# Altium PCB encoder.PcbDoc
Units mm, origin at the board's own origin, x right, y up, seen from the top; angles counter-clockwise.
Board outline 38.38 x 19.8 mm, 2 copper layers (Top Layer, Bottom Layer); 2 components, 4 nets, 12 pads, 24 vias.
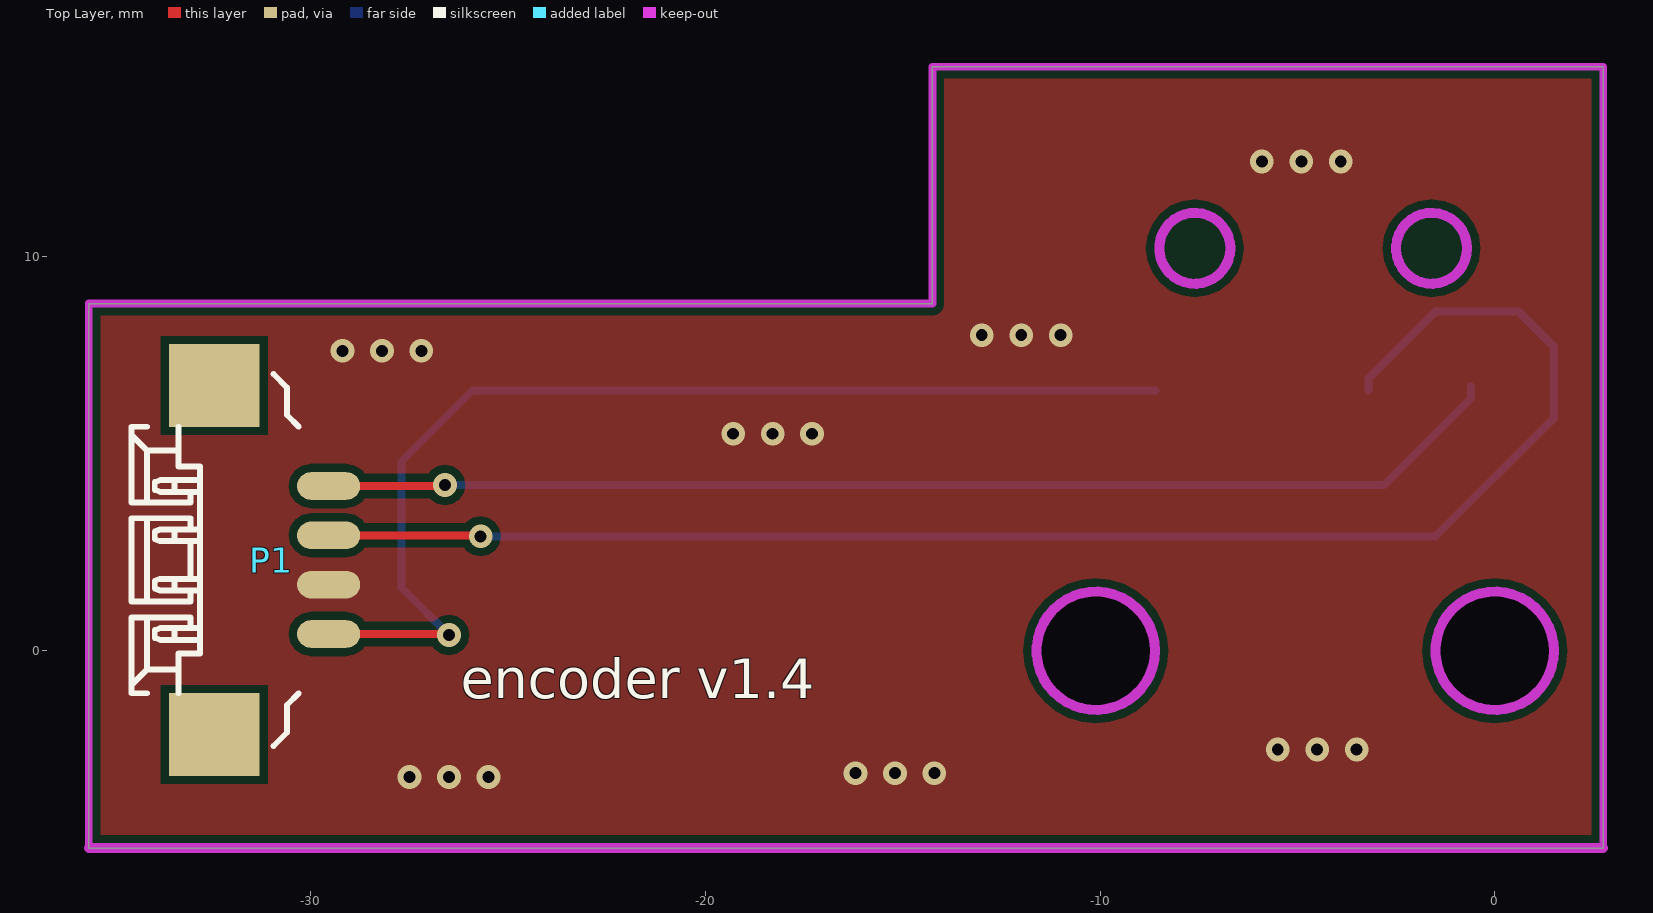
[diagram p0: Top Layer view]
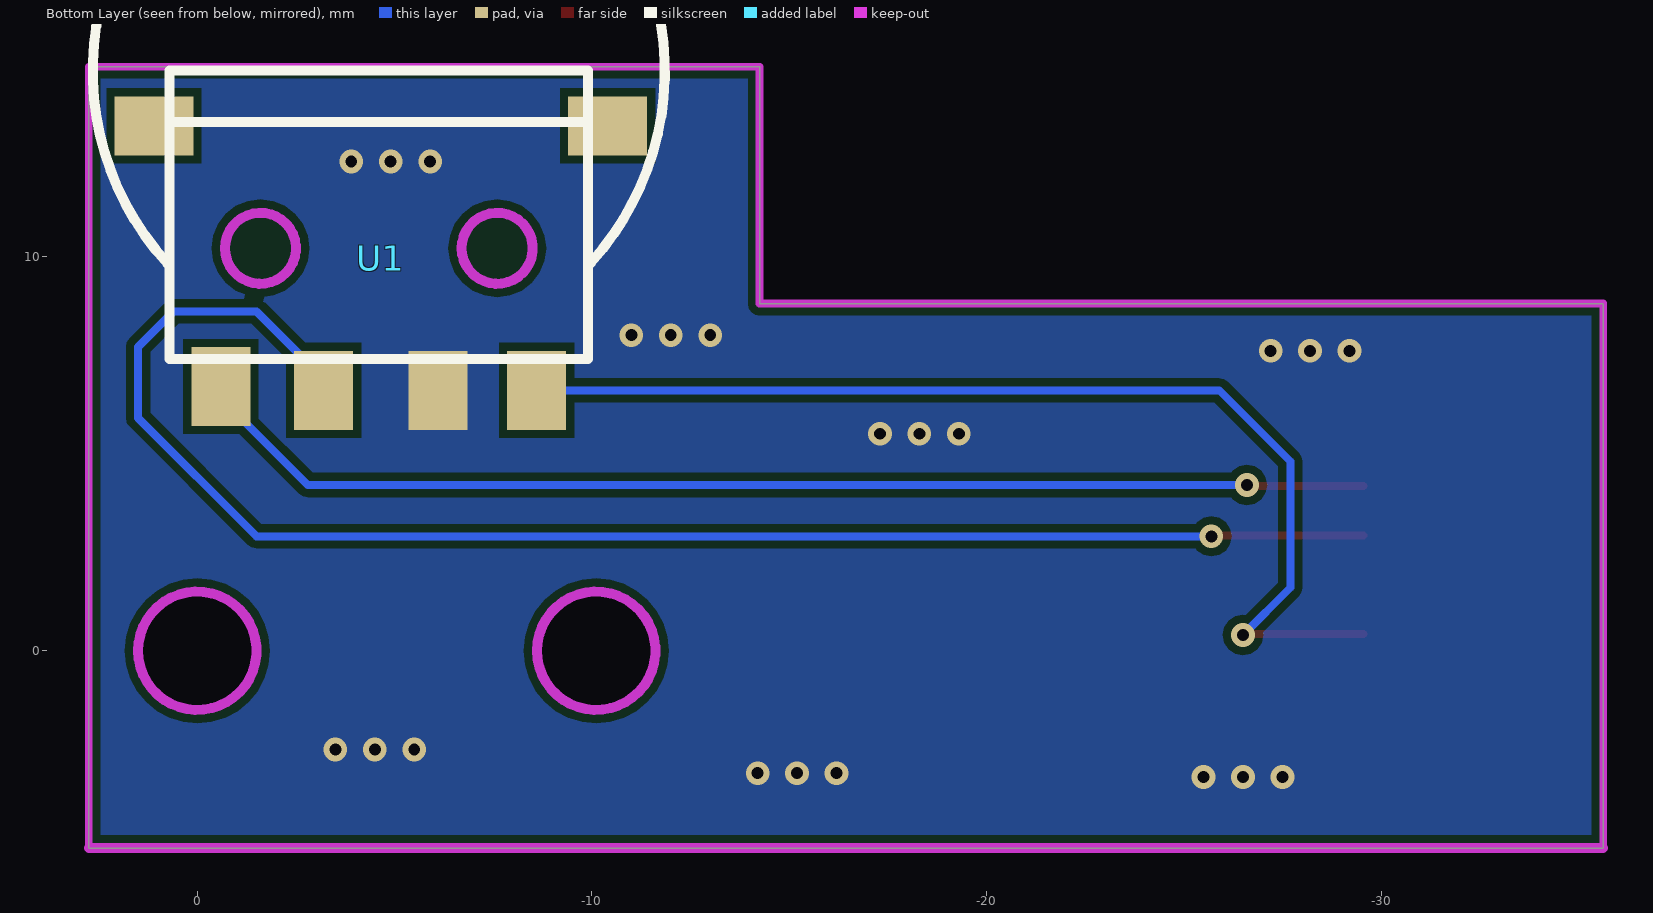
[diagram p1: Bottom Layer view, seen from below]

## Layer stack, top to bottom
Top Layer: signal copper 0.0356
Dielectric: dielectric 0.32, FR-4, Dk 4.8
Bottom Layer: signal copper 0.0356

## Board outline
-35.63,-5 2.75,-5 2.75,14.8 -14.25,14.8 -14.25,8.8 -35.63,8.8
cut-out: -1.507,0 -1.478,-0.294 -1.393,-0.577 -1.253,-0.837 -1.066,-1.066 -0.837,-1.253 -0.577,-1.393 -0.294,-1.478 0,-1.507 0.294,-1.478 0.577,-1.393 0.837,-1.253 1.066,-1.066 1.253,-0.837 1.393,-0.577 1.478,-0.294 1.507,0 1.478,0.294 1.393,0.577 1.253,0.837 1.066,1.066 0.837,1.253 0.577,1.393 0.294,1.478 0,1.507 -0.294,1.478 -0.577,1.393 -0.837,1.253 -1.066,1.066 -1.253,0.837 -1.393,0.577 -1.478,0.294
cut-out: -11.617,0 -11.588,-0.294 -11.503,-0.577 -11.363,-0.837 -11.176,-1.066 -10.947,-1.253 -10.687,-1.393 -10.404,-1.478 -10.11,-1.507 -9.816,-1.478 -9.533,-1.393 -9.273,-1.253 -9.044,-1.066 -8.857,-0.837 -8.717,-0.577 -8.632,-0.294 -8.603,0 -8.632,0.294 -8.717,0.577 -8.857,0.837 -9.044,1.066 -9.273,1.253 -9.533,1.393 -9.816,1.478 -10.11,1.507 -10.404,1.478 -10.687,1.393 -10.947,1.253 -11.176,1.066 -11.363,0.837 -11.503,0.577 -11.588,0.294

## Design rules (kind name [scope] priority, off if disabled: settings)
Clearance [All] p1: gap=0.2
ComponentClearance [All] p1 off: gap=0.254 collisioncheckmode=3 verticalgap=0.254 showdistances=FALSE
PolygonConnect [All] p1: connectstyle=Direct reliefconductorwidth=0.254 reliefentries=4 polygonreliefangle="90 Angle"
RoutingVias [All] p1: holewidth=0.3 width=0.6 viastyle="Through Hole" minholewidth=0.3 minwidth=0.6 maxholewidth=0.3 maxwidth=0.6
SilkscreenOverComponentPads [All] p1: minsilkscreentomaskgap=0.254
SolderMaskExpansion [All] p1: expansion=0.102
Width [All] p1: maxlimit=3 minlimit=0.2 preferedwidth=0.2
26 further rules are at their usual default settings.

## Components (designator, comment, footprint, x,y, rotation, side; value= is the part's Value field where it differs from the comment)
P1 "" "MX1.25-4P 卧" -31,2.3 r90 top
U1 "SIQ-02FVS3滚轮编码器" 美上美SIQ-02FVS3滚轮编码器 -4.6,14.7 r180 bottom

## Footprints (in the part's own frame and the unit in brackets; to place one, negate y for a bottom-side part, rotate by r counter-clockwise, add the part's x,y. Pads: shape width x height; smd on the part's side, far side on the other; paste and mask are expansions set on the pad)
"MX1.25-4P 卧" [mm]
  rect 2.1x2.3 smd: 0(-4.425,1.45) 0(4.425,1.45)
  oval 0.7x1.6 smd: 1(1.875,-1.45) 2(0.625,-1.45) 3(-0.625,-1.45) 4(-1.875,-1.45)
  silkscreen extent -4.71,-0.69 4.71,3.55
美上美SIQ-02FVS3滚轮编码器 [mm]
  rect 2x1.5 smd: 0(-5.7,-1.4) 0(5.8,-1.4)
  rect 1.5x2 smd: 1(-4,-8) 2(-1.4,-8.1) 3(1.5,-8.1) 4(4,-8.1)
  Keep-Out Layer circle w0.254: c-3,-4.5 r0.9
  Keep-Out Layer circle w0.254: c3,-4.5 r0.9
  silkscreen extent -7.25,-7.3 7.25,7.25

## Part data
P1: library part "Header 4", "Header, 4-Pin"

## Via types
v1: diameter 0.6, hole 0.3, Top Layer to Bottom Layer, tented both sides, 24 vias

## Nets (pads, with @x,y where several pads share a name; then routed paths per layer and width w, separated by ;. In a path a pad name is that pad's centre, name@x,y a point inside that pad or via, vN(x,y) a via of type N, cw(c..) or ccw(c..) an arc to the next point about the centre after c; other vN are vias at no path point)
GND: P1.3 U1.3
  other v1: -27.5,-3.2 -26.5,-3.2 -25.5,-3.2 -16.2,-3.1 -15.2,-3.1 -14.2,-3.1 -5.5,-2.5 -4.5,-2.5 -3.5,-2.5 -19.3,5.5 -18.3,5.5 -17.3,5.5 -29.2,7.6 -28.2,7.6 -27.2,7.6 -13,8 -12,8 -11,8 -5.9,12.4 -4.9,12.4 -3.9,12.4
NetP1_1: P1.1 U1.1 | length 30.2
  Top Layer w0.2: P1.1 -26.625,4.175 v1(-26.6,4.2)
  Bottom Layer w0.2: v1(-26.6,4.2) -2.8,4.2 -0.6,6.4 U1.1
NetP1_2: P1.2 U1.2 | length 40.3
  Top Layer w0.2: P1.2 -25.675,2.925 v1@-25.6,3
  Bottom Layer w0.2: v1(-25.7,2.9) -1.5,2.9 1.5,5.9 1.5,7.7 0.6,8.6 -1.5,8.6 -3.2,6.9 U1.2
NetP1_4: P1.4 U1.4 | length 27.8
  Top Layer w0.2: P1.4 v1@-26.525,0.425
  Bottom Layer w0.2: v1(-26.5,0.4) -27.7,1.6 -27.7,4.8 -25.9,6.6 U1.4
pads on no net: P1.0 U1.0

## Polygon pours and split planes (outlines as drawn)
GND on Top Layer "Top Layer-No Net" (solid, remove dead copper, shelved, pour order 1001): -41.8,25.4 -40.8,24.4 11.8,24.4 11.8,-8.6 11.2,-9.2 9,-7 -47,-7
GND on Bottom Layer "Top Layer-No Net" (solid, remove dead copper, shelved, pour order 1000): -42.4,25.3 11.8,25.3 14,23.1 11.3,20.4 11.3,-15.4 -34.1,-15.4 -39.9,-9.6
GND on Bottom Layer "Top Layer-No Net" (solid, remove dead copper): -42,25.6 -40.1,23.7 10,23.7 10,-8.1 6.4,-11.7 5.1,-10.4 -44,-10.4
GND on Top Layer "Top Layer-No Net" (solid, remove dead copper): -43.3,24.6 12.3,24.6 13.2,23.7 11.1,21.6 11.1,-10 -39.6,-10 -39.9,-10.3

## Keep-outs
Keep-Out Layer:
  circle w0.254: c0,0 r1.5
  circle w0.254: c-10.11,0 r1.5
  lines w0.2: -35.63,-5 -35.63,8.8 -14.25,8.8 -14.25,14.8 2.75,14.8 2.75,-5
  lines w0.254: -35.63,-5 2.75,-5

## Silkscreen, mask and mechanical layers (free items; w line width, h text height)
Top Overlay:
  text "encoder v1.4" at -26.2,-1.2 h1